# Altium PCB Panelized_EE02-Module.PcbDoc
Units mm, origin at the board's own origin, x right, y up, seen from the top; angles counter-clockwise.
Board outline 283.48 x 210.5 mm, 6 copper layers (Top, L2 (GND), L3, L4, L5 (PWR), Bottom), stack 0.956 mm thick; 4 components, 0 nets, 521 pads, 0 vias.
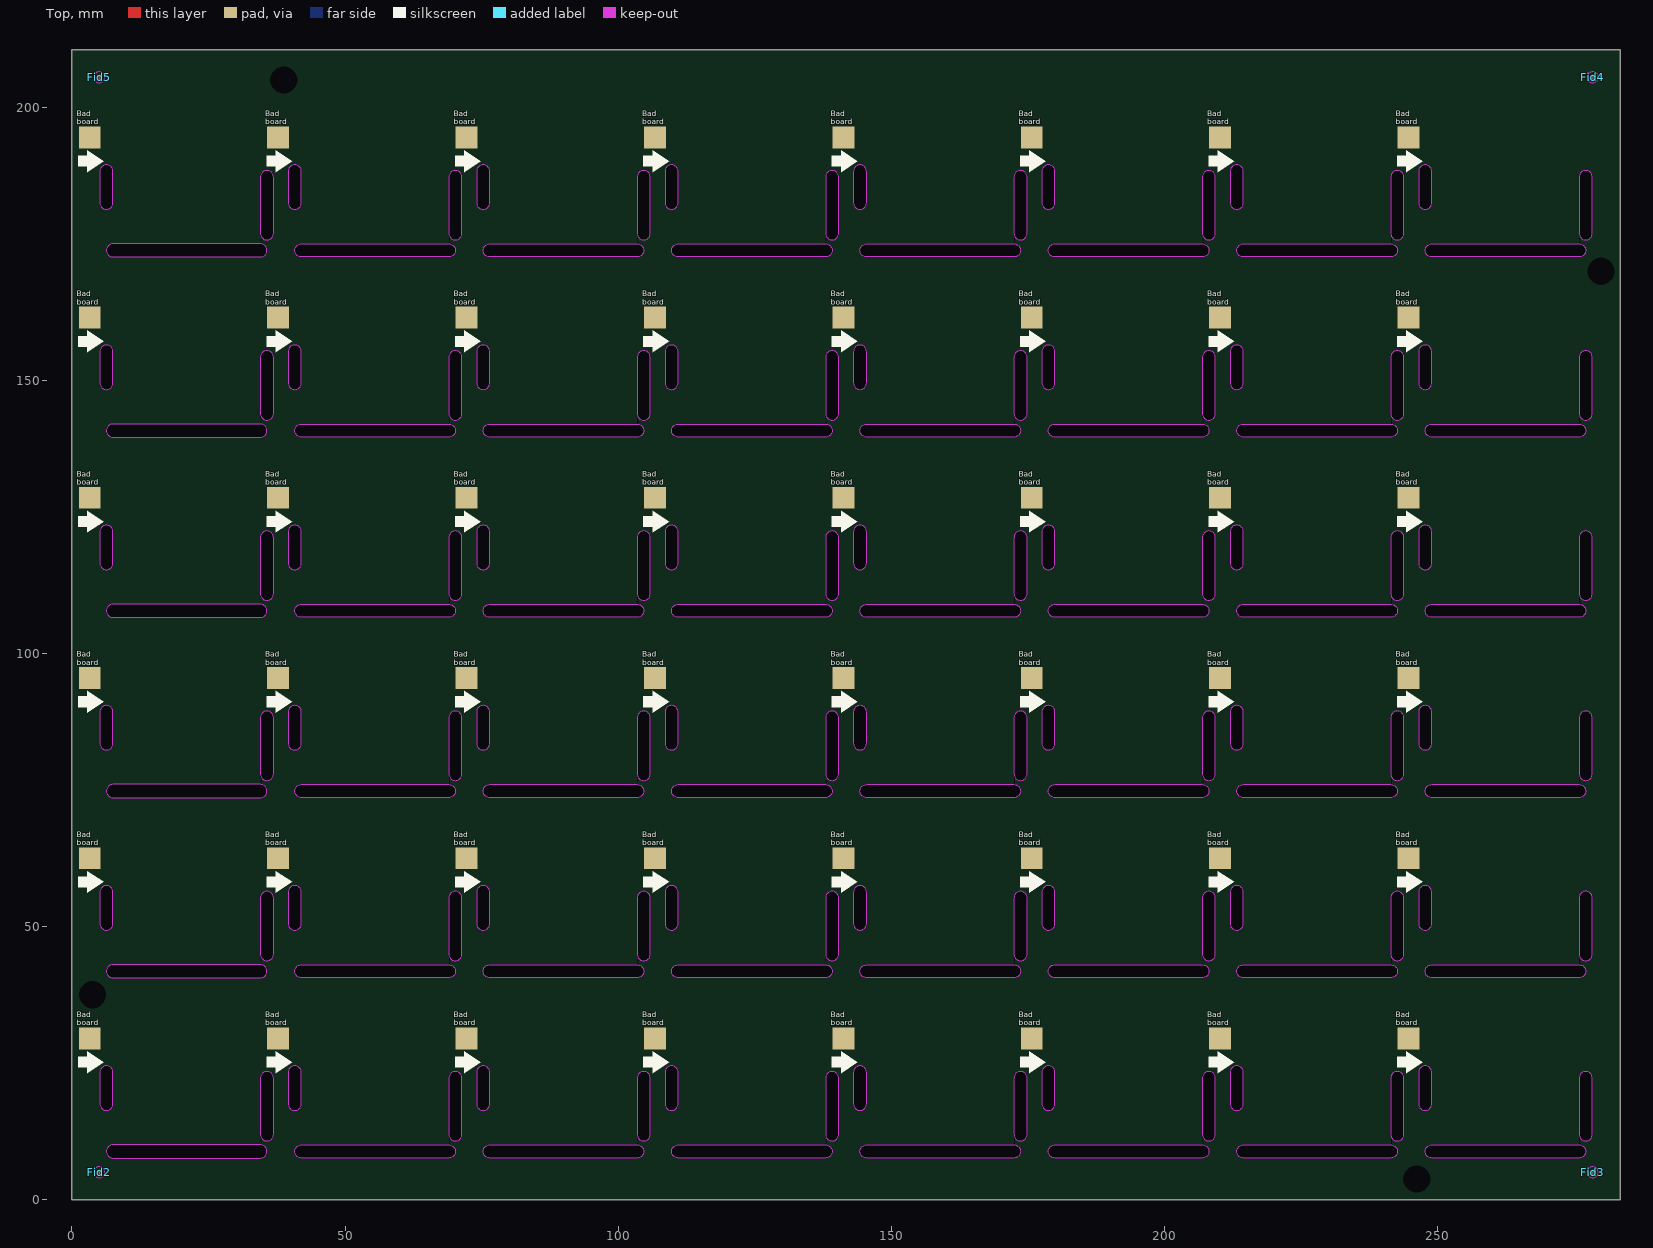
[diagram p0: Top view]
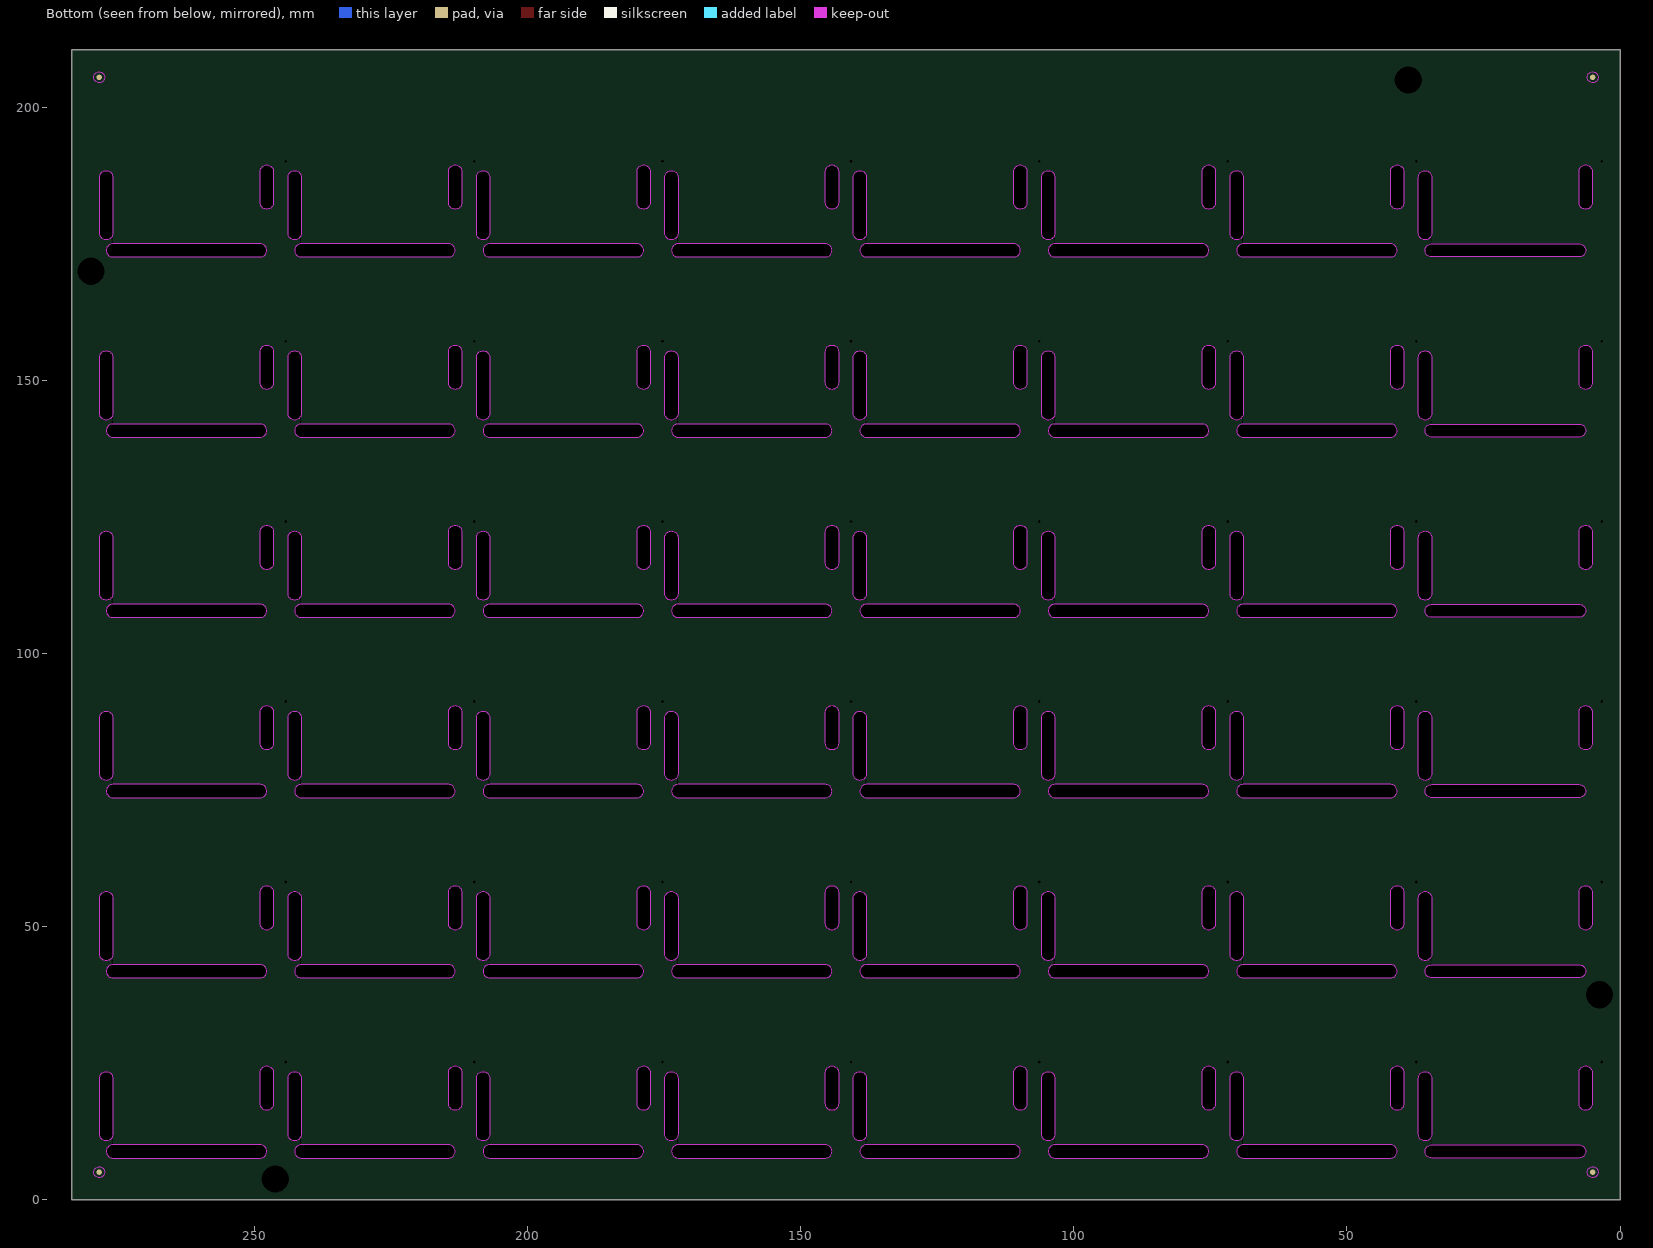
[diagram p1: Bottom view, seen from below]
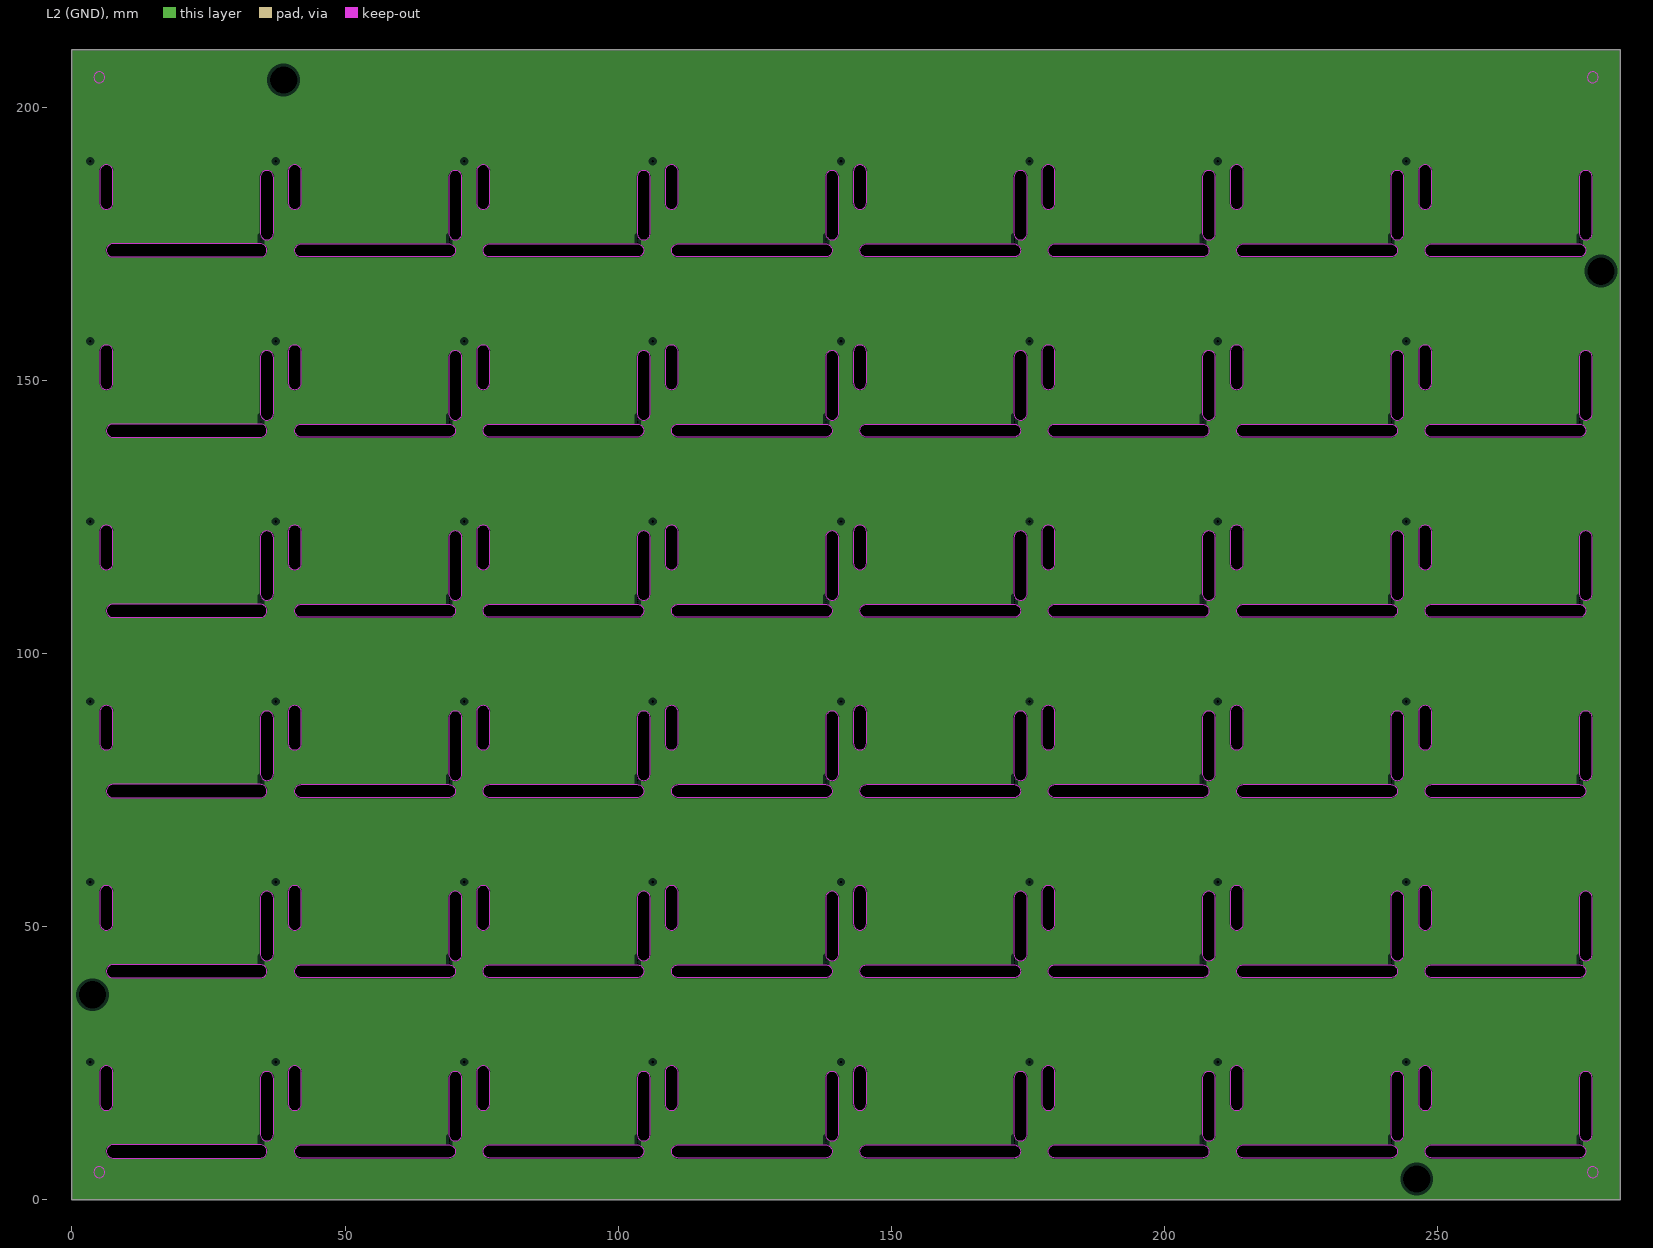
[diagram p2: L2 (GND), clearances drawn from the general rule]
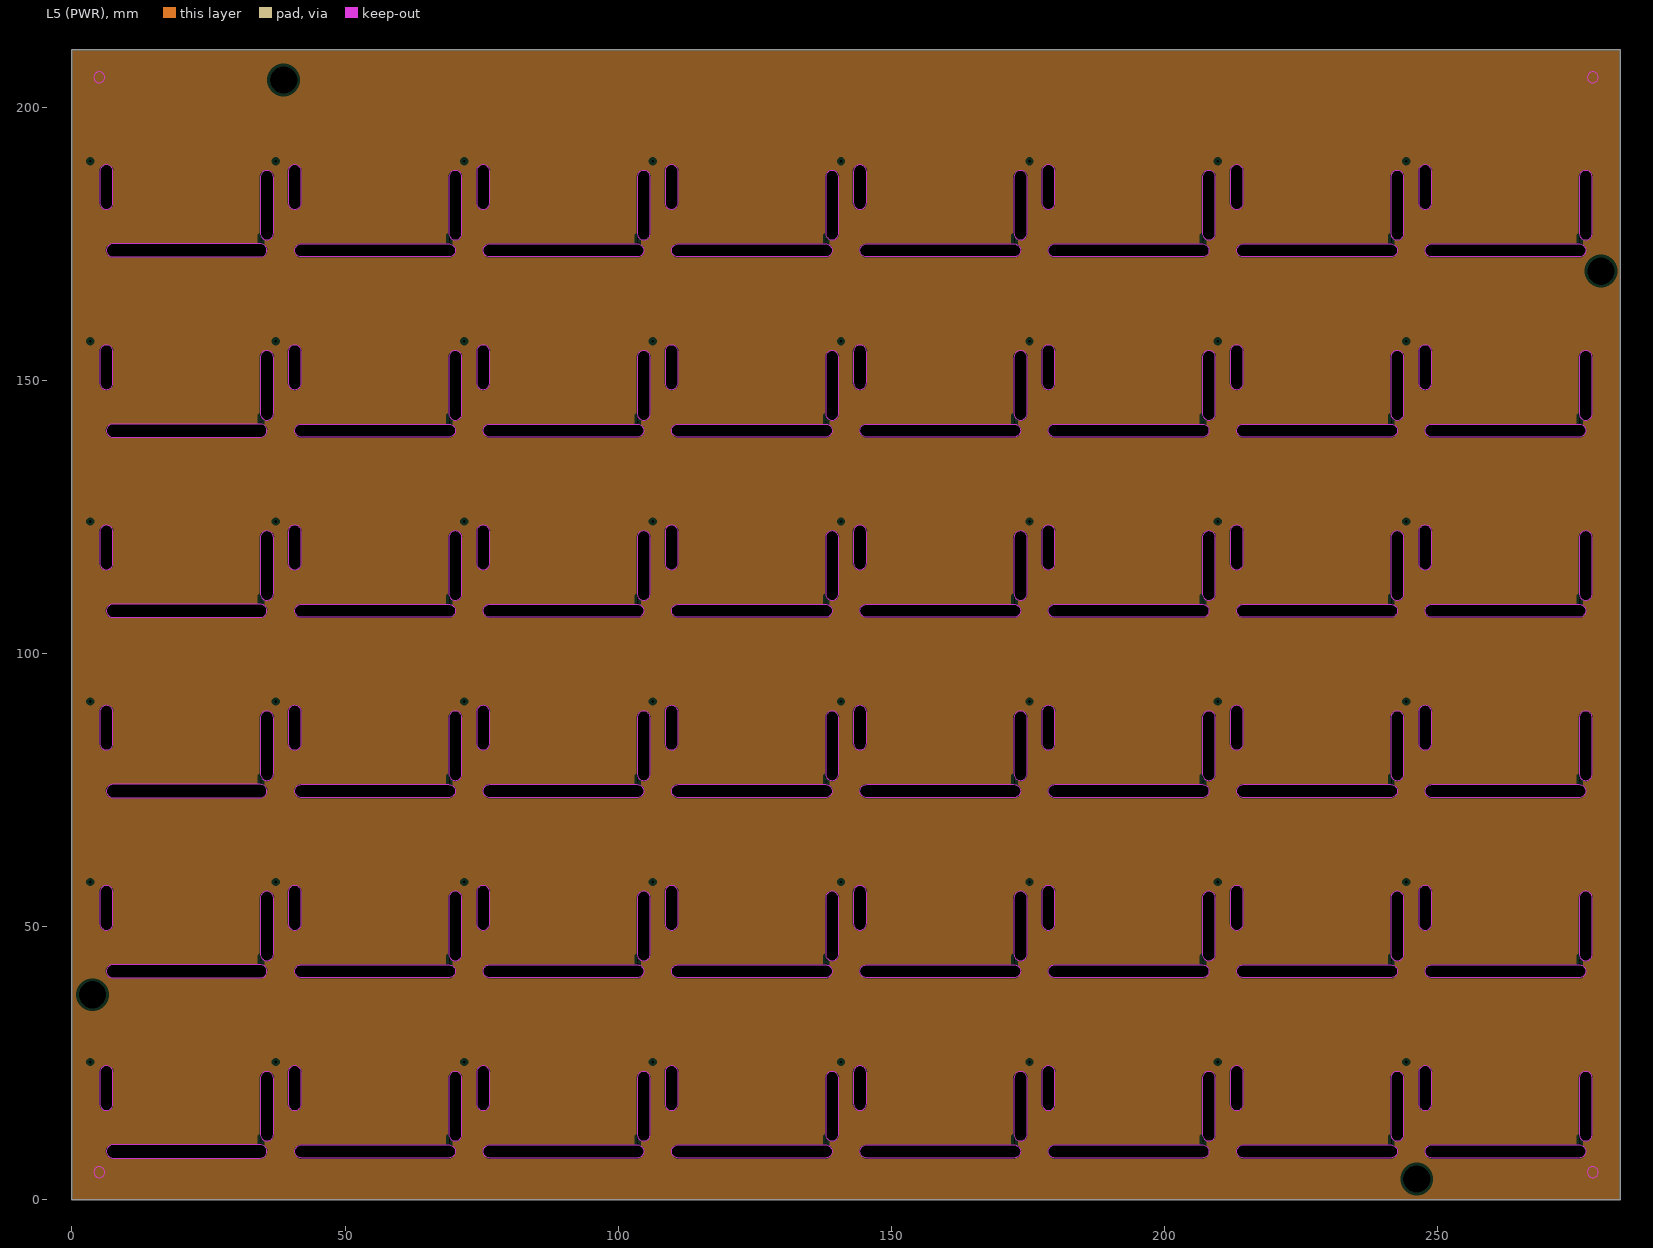
[diagram p3: L5 (PWR), clearances drawn from the general rule]

## Layer stack, top to bottom
Top Solder: solder mask 0.022, Solder Resist, Dk 3.5
Top: signal copper 0.012
Dielectric 1: prepreg 0.075, FR-4, Dk 4.2
L2 (GND): plane copper 0.018
Dielectric 3: core 0.1, Dk 4.2
L3: signal copper 0.018
Dielectric 4: prepreg 0.51, Dk 4.2
L4: signal copper 0.018
Dielectric 5: core 0.1, Dk 4.2
L5 (PWR): plane copper 0.018
Dielectric 6: prepreg 0.075, Dk 4.2
Bottom: signal copper 0.012
Bottom Solder: solder mask 0.022, Solder Resist, Dk 3.5

## Board outline
0,0 283.475,0 283.475,210.5 0,210.5
cut-out: 7.5,172.6 34.5,172.6 ccw(c34.5,173.8) 35.7,173.8 ccw(c34.5,173.8) 34.5,175 7.5,175 ccw(c7.5,173.8)
cut-out: 5.1,182.525 ccw(c6.3,182.525) 7.5,182.525 7.5,188.275 ccw(c6.3,188.275) 5.1,188.275
cut-out: 34.5,176.925 ccw(c35.7,176.925) 36.9,176.925 36.9,187.225 ccw(c35.7,187.225) 34.5,187.225
cut-out: 39.6,182.525 ccw(c40.8,182.525) 42,182.525 42,188.275 ccw(c40.8,188.275) 39.6,188.275
cut-out: 42,172.6 cw(c42,173.8) 42,175 69,175 cw(c69,173.8) 70.2,173.8 cw(c69,173.8) 69,172.6
cut-out: 69,176.925 ccw(c70.2,176.925) 71.4,176.925 71.4,187.225 ccw(c70.2,187.225) 69,187.225
cut-out: 74.1,182.525 ccw(c75.3,182.525) 76.5,182.525 76.5,188.275 ccw(c75.3,188.275) 74.1,188.275
cut-out: 76.5,172.6 cw(c76.5,173.8) 76.5,175 103.5,175 cw(c103.5,173.8) 104.7,173.8 cw(c103.5,173.8) 103.5,172.6
cut-out: 103.5,176.925 ccw(c104.7,176.925) 105.9,176.925 105.9,187.225 ccw(c104.7,187.225) 103.5,187.225
cut-out: 108.6,182.525 ccw(c109.8,182.525) 111,182.525 111,188.275 ccw(c109.8,188.275) 108.6,188.275
cut-out: 111,172.6 cw(c111,173.8) 111,175 138,175 cw(c138,173.8) 139.2,173.8 cw(c138,173.8) 138,172.6
cut-out: 138,176.925 ccw(c139.2,176.925) 140.4,176.925 140.4,187.225 ccw(c139.2,187.225) 138,187.225
cut-out: 143.1,182.525 ccw(c144.3,182.525) 145.5,182.525 145.5,188.275 ccw(c144.3,188.275) 143.1,188.275
cut-out: 145.5,172.6 cw(c145.5,173.8) 145.5,175 172.5,175 cw(c172.5,173.8) 173.7,173.8 cw(c172.5,173.8) 172.5,172.6
cut-out: 172.5,176.925 ccw(c173.7,176.925) 174.9,176.925 174.9,187.225 ccw(c173.7,187.225) 172.5,187.225
cut-out: 177.6,182.525 ccw(c178.8,182.525) 180,182.525 180,188.275 ccw(c178.8,188.275) 177.6,188.275
cut-out: 180,172.6 cw(c180,173.8) 180,175 207,175 cw(c207,173.8) 208.2,173.8 cw(c207,173.8) 207,172.6
cut-out: 207,176.925 ccw(c208.2,176.925) 209.4,176.925 209.4,187.225 ccw(c208.2,187.225) 207,187.225
cut-out: 212.1,182.525 ccw(c213.3,182.525) 214.5,182.525 214.5,188.275 ccw(c213.3,188.275) 212.1,188.275
cut-out: 214.5,172.6 cw(c214.5,173.8) 214.5,175 241.5,175 cw(c241.5,173.8) 242.7,173.8 cw(c241.5,173.8) 241.5,172.6
cut-out: 241.5,176.925 ccw(c242.7,176.925) 243.9,176.925 243.9,187.225 ccw(c242.7,187.225) 241.5,187.225
cut-out: 246.6,182.525 ccw(c247.8,182.525) 249,182.525 249,188.275 ccw(c247.8,188.275) 246.6,188.275
cut-out: 249,172.6 cw(c249,173.8) 249,175 276,175 cw(c276,173.8) 277.2,173.8 cw(c276,173.8) 276,172.6
cut-out: 276,176.925 ccw(c277.2,176.925) 278.4,176.925 278.4,187.225 ccw(c277.2,187.225) 276,187.225
cut-out: 7.5,139.6 34.5,139.6 ccw(c34.5,140.8) 35.7,140.8 ccw(c34.5,140.8) 34.5,142 7.5,142 ccw(c7.5,140.8)
cut-out: 5.1,149.525 ccw(c6.3,149.525) 7.5,149.525 7.5,155.275 ccw(c6.3,155.275) 5.1,155.275
cut-out: 34.5,143.925 ccw(c35.7,143.925) 36.9,143.925 36.9,154.225 ccw(c35.7,154.225) 34.5,154.225
cut-out: 39.6,149.525 ccw(c40.8,149.525) 42,149.525 42,155.275 ccw(c40.8,155.275) 39.6,155.275
cut-out: 42,139.6 cw(c42,140.8) 42,142 69,142 cw(c69,140.8) 70.2,140.8 cw(c69,140.8) 69,139.6
cut-out: 69,143.925 ccw(c70.2,143.925) 71.4,143.925 71.4,154.225 ccw(c70.2,154.225) 69,154.225
cut-out: 74.1,149.525 ccw(c75.3,149.525) 76.5,149.525 76.5,155.275 ccw(c75.3,155.275) 74.1,155.275
cut-out: 76.5,139.6 cw(c76.5,140.8) 76.5,142 103.5,142 cw(c103.5,140.8) 104.7,140.8 cw(c103.5,140.8) 103.5,139.6
cut-out: 103.5,143.925 ccw(c104.7,143.925) 105.9,143.925 105.9,154.225 ccw(c104.7,154.225) 103.5,154.225
cut-out: 108.6,149.525 ccw(c109.8,149.525) 111,149.525 111,155.275 ccw(c109.8,155.275) 108.6,155.275
cut-out: 111,139.6 cw(c111,140.8) 111,142 138,142 cw(c138,140.8) 139.2,140.8 cw(c138,140.8) 138,139.6
cut-out: 138,143.925 ccw(c139.2,143.925) 140.4,143.925 140.4,154.225 ccw(c139.2,154.225) 138,154.225
cut-out: 143.1,149.525 ccw(c144.3,149.525) 145.5,149.525 145.5,155.275 ccw(c144.3,155.275) 143.1,155.275
cut-out: 145.5,139.6 cw(c145.5,140.8) 145.5,142 172.5,142 cw(c172.5,140.8) 173.7,140.8 cw(c172.5,140.8) 172.5,139.6
cut-out: 172.5,143.925 ccw(c173.7,143.925) 174.9,143.925 174.9,154.225 ccw(c173.7,154.225) 172.5,154.225
cut-out: 177.6,149.525 ccw(c178.8,149.525) 180,149.525 180,155.275 ccw(c178.8,155.275) 177.6,155.275
cut-out: 180,139.6 cw(c180,140.8) 180,142 207,142 cw(c207,140.8) 208.2,140.8 cw(c207,140.8) 207,139.6
cut-out: 207,143.925 ccw(c208.2,143.925) 209.4,143.925 209.4,154.225 ccw(c208.2,154.225) 207,154.225
cut-out: 212.1,149.525 ccw(c213.3,149.525) 214.5,149.525 214.5,155.275 ccw(c213.3,155.275) 212.1,155.275
cut-out: 214.5,139.6 cw(c214.5,140.8) 214.5,142 241.5,142 cw(c241.5,140.8) 242.7,140.8 cw(c241.5,140.8) 241.5,139.6
cut-out: 241.5,143.925 ccw(c242.7,143.925) 243.9,143.925 243.9,154.225 ccw(c242.7,154.225) 241.5,154.225
cut-out: 246.6,149.525 ccw(c247.8,149.525) 249,149.525 249,155.275 ccw(c247.8,155.275) 246.6,155.275
cut-out: 249,139.6 cw(c249,140.8) 249,142 276,142 cw(c276,140.8) 277.2,140.8 cw(c276,140.8) 276,139.6
cut-out: 276,143.925 ccw(c277.2,143.925) 278.4,143.925 278.4,154.225 ccw(c277.2,154.225) 276,154.225
cut-out: 7.5,106.6 34.5,106.6 ccw(c34.5,107.8) 35.7,107.8 ccw(c34.5,107.8) 34.5,109 7.5,109 ccw(c7.5,107.8)
cut-out: 5.1,116.525 ccw(c6.3,116.525) 7.5,116.525 7.5,122.275 ccw(c6.3,122.275) 5.1,122.275
cut-out: 34.5,110.925 ccw(c35.7,110.925) 36.9,110.925 36.9,121.225 ccw(c35.7,121.225) 34.5,121.225
cut-out: 39.6,116.525 ccw(c40.8,116.525) 42,116.525 42,122.275 ccw(c40.8,122.275) 39.6,122.275
cut-out: 42,106.6 cw(c42,107.8) 42,109 69,109 cw(c69,107.8) 70.2,107.8 cw(c69,107.8) 69,106.6
cut-out: 69,110.925 ccw(c70.2,110.925) 71.4,110.925 71.4,121.225 ccw(c70.2,121.225) 69,121.225
cut-out: 74.1,116.525 ccw(c75.3,116.525) 76.5,116.525 76.5,122.275 ccw(c75.3,122.275) 74.1,122.275
cut-out: 76.5,106.6 cw(c76.5,107.8) 76.5,109 103.5,109 cw(c103.5,107.8) 104.7,107.8 cw(c103.5,107.8) 103.5,106.6
cut-out: 103.5,110.925 ccw(c104.7,110.925) 105.9,110.925 105.9,121.225 ccw(c104.7,121.225) 103.5,121.225
cut-out: 108.6,116.525 ccw(c109.8,116.525) 111,116.525 111,122.275 ccw(c109.8,122.275) 108.6,122.275
cut-out: 111,106.6 cw(c111,107.8) 111,109 138,109 cw(c138,107.8) 139.2,107.8 cw(c138,107.8) 138,106.6
cut-out: 138,110.925 ccw(c139.2,110.925) 140.4,110.925 140.4,121.225 ccw(c139.2,121.225) 138,121.225
cut-out: 143.1,116.525 ccw(c144.3,116.525) 145.5,116.525 145.5,122.275 ccw(c144.3,122.275) 143.1,122.275
cut-out: 145.5,106.6 cw(c145.5,107.8) 145.5,109 172.5,109 cw(c172.5,107.8) 173.7,107.8 cw(c172.5,107.8) 172.5,106.6
cut-out: 172.5,110.925 ccw(c173.7,110.925) 174.9,110.925 174.9,121.225 ccw(c173.7,121.225) 172.5,121.225
cut-out: 177.6,116.525 ccw(c178.8,116.525) 180,116.525 180,122.275 ccw(c178.8,122.275) 177.6,122.275
cut-out: 180,106.6 cw(c180,107.8) 180,109 207,109 cw(c207,107.8) 208.2,107.8 cw(c207,107.8) 207,106.6
cut-out: 207,110.925 ccw(c208.2,110.925) 209.4,110.925 209.4,121.225 ccw(c208.2,121.225) 207,121.225
cut-out: 212.1,116.525 ccw(c213.3,116.525) 214.5,116.525 214.5,122.275 ccw(c213.3,122.275) 212.1,122.275
cut-out: 214.5,106.6 cw(c214.5,107.8) 214.5,109 241.5,109 cw(c241.5,107.8) 242.7,107.8 cw(c241.5,107.8) 241.5,106.6
cut-out: 241.5,110.925 ccw(c242.7,110.925) 243.9,110.925 243.9,121.225 ccw(c242.7,121.225) 241.5,121.225
cut-out: 246.6,116.525 ccw(c247.8,116.525) 249,116.525 249,122.275 ccw(c247.8,122.275) 246.6,122.275
cut-out: 249,106.6 cw(c249,107.8) 249,109 276,109 cw(c276,107.8) 277.2,107.8 cw(c276,107.8) 276,106.6
cut-out: 276,110.925 ccw(c277.2,110.925) 278.4,110.925 278.4,121.225 ccw(c277.2,121.225) 276,121.225
cut-out: 7.5,73.6 34.5,73.6 ccw(c34.5,74.8) 35.7,74.8 ccw(c34.5,74.8) 34.5,76 7.5,76 ccw(c7.5,74.8)
cut-out: 5.1,83.525 ccw(c6.3,83.525) 7.5,83.525 7.5,89.275 ccw(c6.3,89.275) 5.1,89.275
cut-out: 34.5,77.925 ccw(c35.7,77.925) 36.9,77.925 36.9,88.225 ccw(c35.7,88.225) 34.5,88.225
cut-out: 39.6,83.525 ccw(c40.8,83.525) 42,83.525 42,89.275 ccw(c40.8,89.275) 39.6,89.275
cut-out: 42,73.6 cw(c42,74.8) 42,76 69,76 cw(c69,74.8) 70.2,74.8 cw(c69,74.8) 69,73.6
cut-out: 69,77.925 ccw(c70.2,77.925) 71.4,77.925 71.4,88.225 ccw(c70.2,88.225) 69,88.225
cut-out: 74.1,83.525 ccw(c75.3,83.525) 76.5,83.525 76.5,89.275 ccw(c75.3,89.275) 74.1,89.275
cut-out: 76.5,73.6 cw(c76.5,74.8) 76.5,76 103.5,76 cw(c103.5,74.8) 104.7,74.8 cw(c103.5,74.8) 103.5,73.6
cut-out: 103.5,77.925 ccw(c104.7,77.925) 105.9,77.925 105.9,88.225 ccw(c104.7,88.225) 103.5,88.225
cut-out: 108.6,83.525 ccw(c109.8,83.525) 111,83.525 111,89.275 ccw(c109.8,89.275) 108.6,89.275
cut-out: 111,73.6 cw(c111,74.8) 111,76 138,76 cw(c138,74.8) 139.2,74.8 cw(c138,74.8) 138,73.6
cut-out: 138,77.925 ccw(c139.2,77.925) 140.4,77.925 140.4,88.225 ccw(c139.2,88.225) 138,88.225
cut-out: 143.1,83.525 ccw(c144.3,83.525) 145.5,83.525 145.5,89.275 ccw(c144.3,89.275) 143.1,89.275
cut-out: 145.5,73.6 cw(c145.5,74.8) 145.5,76 172.5,76 cw(c172.5,74.8) 173.7,74.8 cw(c172.5,74.8) 172.5,73.6
cut-out: 172.5,77.925 ccw(c173.7,77.925) 174.9,77.925 174.9,88.225 ccw(c173.7,88.225) 172.5,88.225
cut-out: 177.6,83.525 ccw(c178.8,83.525) 180,83.525 180,89.275 ccw(c178.8,89.275) 177.6,89.275
cut-out: 180,73.6 cw(c180,74.8) 180,76 207,76 cw(c207,74.8) 208.2,74.8 cw(c207,74.8) 207,73.6
cut-out: 207,77.925 ccw(c208.2,77.925) 209.4,77.925 209.4,88.225 ccw(c208.2,88.225) 207,88.225
cut-out: 212.1,83.525 ccw(c213.3,83.525) 214.5,83.525 214.5,89.275 ccw(c213.3,89.275) 212.1,89.275
cut-out: 214.5,73.6 cw(c214.5,74.8) 214.5,76 241.5,76 cw(c241.5,74.8) 242.7,74.8 cw(c241.5,74.8) 241.5,73.6
cut-out: 241.5,77.925 ccw(c242.7,77.925) 243.9,77.925 243.9,88.225 ccw(c242.7,88.225) 241.5,88.225
cut-out: 246.6,83.525 ccw(c247.8,83.525) 249,83.525 249,89.275 ccw(c247.8,89.275) 246.6,89.275
cut-out: 249,73.6 cw(c249,74.8) 249,76 276,76 cw(c276,74.8) 277.2,74.8 cw(c276,74.8) 276,73.6
cut-out: 276,77.925 ccw(c277.2,77.925) 278.4,77.925 278.4,88.225 ccw(c277.2,88.225) 276,88.225
cut-out: 7.5,40.6 34.5,40.6 ccw(c34.5,41.8) 35.7,41.8 ccw(c34.5,41.8) 34.5,43 7.5,43 ccw(c7.5,41.8)
cut-out: 5.1,50.525 ccw(c6.3,50.525) 7.5,50.525 7.5,56.275 ccw(c6.3,56.275) 5.1,56.275
cut-out: 34.5,44.925 ccw(c35.7,44.925) 36.9,44.925 36.9,55.225 ccw(c35.7,55.225) 34.5,55.225
cut-out: 39.6,50.525 ccw(c40.8,50.525) 42,50.525 42,56.275 ccw(c40.8,56.275) 39.6,56.275
cut-out: 42,40.6 cw(c42,41.8) 42,43 69,43 cw(c69,41.8) 70.2,41.8 cw(c69,41.8) 69,40.6
cut-out: 69,44.925 ccw(c70.2,44.925) 71.4,44.925 71.4,55.225 ccw(c70.2,55.225) 69,55.225
cut-out: 74.1,50.525 ccw(c75.3,50.525) 76.5,50.525 76.5,56.275 ccw(c75.3,56.275) 74.1,56.275
cut-out: 76.5,40.6 cw(c76.5,41.8) 76.5,43 103.5,43 cw(c103.5,41.8) 104.7,41.8 cw(c103.5,41.8) 103.5,40.6
cut-out: 103.5,44.925 ccw(c104.7,44.925) 105.9,44.925 105.9,55.225 ccw(c104.7,55.225) 103.5,55.225
cut-out: 108.6,50.525 ccw(c109.8,50.525) 111,50.525 111,56.275 ccw(c109.8,56.275) 108.6,56.275
cut-out: 111,40.6 cw(c111,41.8) 111,43 138,43 cw(c138,41.8) 139.2,41.8 cw(c138,41.8) 138,40.6
cut-out: 138,44.925 ccw(c139.2,44.925) 140.4,44.925 140.4,55.225 ccw(c139.2,55.225) 138,55.225
cut-out: 143.1,50.525 ccw(c144.3,50.525) 145.5,50.525 145.5,56.275 ccw(c144.3,56.275) 143.1,56.275
cut-out: 145.5,40.6 cw(c145.5,41.8) 145.5,43 172.5,43 cw(c172.5,41.8) 173.7,41.8 cw(c172.5,41.8) 172.5,40.6
cut-out: 172.5,44.925 ccw(c173.7,44.925) 174.9,44.925 174.9,55.225 ccw(c173.7,55.225) 172.5,55.225
cut-out: 177.6,50.525 ccw(c178.8,50.525) 180,50.525 180,56.275 ccw(c178.8,56.275) 177.6,56.275
cut-out: 180,40.6 cw(c180,41.8) 180,43 207,43 cw(c207,41.8) 208.2,41.8 cw(c207,41.8) 207,40.6
cut-out: 207,44.925 ccw(c208.2,44.925) 209.4,44.925 209.4,55.225 ccw(c208.2,55.225) 207,55.225
cut-out: 212.1,50.525 ccw(c213.3,50.525) 214.5,50.525 214.5,56.275 ccw(c213.3,56.275) 212.1,56.275
cut-out: 214.5,40.6 cw(c214.5,41.8) 214.5,43 241.5,43 cw(c241.5,41.8) 242.7,41.8 cw(c241.5,41.8) 241.5,40.6
cut-out: 241.5,44.925 ccw(c242.7,44.925) 243.9,44.925 243.9,55.225 ccw(c242.7,55.225) 241.5,55.225
cut-out: 246.6,50.525 ccw(c247.8,50.525) 249,50.525 249,56.275 ccw(c247.8,56.275) 246.6,56.275
cut-out: 249,40.6 cw(c249,41.8) 249,43 276,43 cw(c276,41.8) 277.2,41.8 cw(c276,41.8) 276,40.6
cut-out: 276,44.925 ccw(c277.2,44.925) 278.4,44.925 278.4,55.225 ccw(c277.2,55.225) 276,55.225
cut-out: 276,11.925 ccw(c277.2,11.925) 278.4,11.925 278.4,22.225 ccw(c277.2,22.225) 276,22.225
cut-out: 249,7.6 cw(c249,8.8) 249,10 276,10 cw(c276,8.8) 277.2,8.8 cw(c276,8.8) 276,7.6
cut-out: 246.6,17.525 ccw(c247.8,17.525) 249,17.525 249,23.275 ccw(c247.8,23.275) 246.6,23.275
cut-out: 241.5,11.925 ccw(c242.7,11.925) 243.9,11.925 243.9,22.225 ccw(c242.7,22.225) 241.5,22.225
cut-out: 214.5,7.6 cw(c214.5,8.8) 214.5,10 241.5,10 cw(c241.5,8.8) 242.7,8.8 cw(c241.5,8.8) 241.5,7.6
cut-out: 212.1,17.525 ccw(c213.3,17.525) 214.5,17.525 214.5,23.275 ccw(c213.3,23.275) 212.1,23.275
cut-out: 207,11.925 ccw(c208.2,11.925) 209.4,11.925 209.4,22.225 ccw(c208.2,22.225) 207,22.225
cut-out: 180,7.6 cw(c180,8.8) 180,10 207,10 cw(c207,8.8) 208.2,8.8 cw(c207,8.8) 207,7.6
cut-out: 177.6,17.525 ccw(c178.8,17.525) 180,17.525 180,23.275 ccw(c178.8,23.275) 177.6,23.275
cut-out: 172.5,11.925 ccw(c173.7,11.925) 174.9,11.925 174.9,22.225 ccw(c173.7,22.225) 172.5,22.225
cut-out: 145.5,7.6 cw(c145.5,8.8) 145.5,10 172.5,10 cw(c172.5,8.8) 173.7,8.8 cw(c172.5,8.8) 172.5,7.6
cut-out: 143.1,17.525 ccw(c144.3,17.525) 145.5,17.525 145.5,23.275 ccw(c144.3,23.275) 143.1,23.275
cut-out: 138,11.925 ccw(c139.2,11.925) 140.4,11.925 140.4,22.225 ccw(c139.2,22.225) 138,22.225
cut-out: 111,7.6 cw(c111,8.8) 111,10 138,10 cw(c138,8.8) 139.2,8.8 cw(c138,8.8) 138,7.6
cut-out: 108.6,17.525 ccw(c109.8,17.525) 111,17.525 111,23.275 ccw(c109.8,23.275) 108.6,23.275
cut-out: 103.5,11.925 ccw(c104.7,11.925) 105.9,11.925 105.9,22.225 ccw(c104.7,22.225) 103.5,22.225
cut-out: 76.5,7.6 cw(c76.5,8.8) 76.5,10 103.5,10 cw(c103.5,8.8) 104.7,8.8 cw(c103.5,8.8) 103.5,7.6
cut-out: 74.1,17.525 ccw(c75.3,17.525) 76.5,17.525 76.5,23.275 ccw(c75.3,23.275) 74.1,23.275
cut-out: 69,11.925 ccw(c70.2,11.925) 71.4,11.925 71.4,22.225 ccw(c70.2,22.225) 69,22.225
cut-out: 42,7.6 cw(c42,8.8) 42,10 69,10 cw(c69,8.8) 70.2,8.8 cw(c69,8.8) 69,7.6
cut-out: 39.6,17.525 ccw(c40.8,17.525) 42,17.525 42,23.275 ccw(c40.8,23.275) 39.6,23.275
cut-out: 34.5,11.925 ccw(c35.7,11.925) 36.9,11.925 36.9,22.225 ccw(c35.7,22.225) 34.5,22.225
cut-out: 5.1,17.525 ccw(c6.3,17.525) 7.5,17.525 7.5,23.275 ccw(c6.3,23.275) 5.1,23.275
cut-out: 7.5,7.6 34.5,7.6 ccw(c34.5,8.8) 35.7,8.8 ccw(c34.5,8.8) 34.5,10 7.5,10 ccw(c7.5,8.8)

## Design rules (kind name [scope] priority, off if disabled: settings)
Clearance [All] p1: gap=0.254
PlaneClearance [All] p1: clearance=0.508
PlaneConnect [All] p1: planeconnectstyle=Relief reliefexpansion=0.508 reliefentries=4 reliefconductorwidth=0.254 reliefairgap=0.254
PolygonConnect [All] p1: connectstyle=Relief reliefconductorwidth=0.254 reliefentries=4 polygonreliefangle="90 Angle" airgapwidth=0.254
RoutingVias [All] p1: holewidth=0.711 width=1.27 viastyle="Through Hole" minholewidth=0.711 minwidth=1.27 maxholewidth=0.711 maxwidth=1.27
SolderMaskExpansion [All] p1: expansion=0.102
Width [All] p1: maxlimit=0.254 minlimit=0.254 preferedwidth=0.254
28 further rules are at their usual default settings.

## Components (designator, comment, footprint, x,y, rotation, side; value= is the part's Value field where it differs from the comment)
Fid2 "Fiducial" Fiducial 5,5 r0 top
Fid3 "Fiducial" Fiducial 278.5,5 r0 top
Fid4 "Fiducial" Fiducial 278.5,205.5 r0 top
Fid5 "Fiducial" Fiducial 5,205.5 r0 top

## Footprints (in the part's own frame and the unit in brackets; to place one, negate y for a bottom-side part, rotate by r counter-clockwise, add the part's x,y. Pads: shape width x height; smd on the part's side, far side on the other; paste and mask are expansions set on the pad)
Fiducial [mm]
  round 1 smd paste-10 mask+0.5: 0(0,0)
  round 1 smd far side paste-10 mask+0.5: 0(0,0)
  Keep-Out Layer circle w0.01: c0,0 r1

## Free pads (board coordinates)
  rect 4x4 smd paste-10 mask+0: 1(3.25,29.5) 1(3.25,62.5) 1(3.25,95.5) 1(3.25,128.5) 1(3.25,161.5) 1(3.25,194.5) 10(37.75,29.5) 10(37.75,62.5) 10(37.75,95.5) 10(37.75,128.5) 10(37.75,161.5) 10(37.75,194.5) 11(72.25,29.5) 11(72.25,62.5) 11(72.25,95.5) 11(72.25,128.5) 11(72.25,161.5) 11(72.25,194.5) 12(106.75,29.5) 12(106.75,62.5) 12(106.75,95.5) 12(106.75,128.5) 12(106.75,161.5) 12(106.75,194.5) 13(141.25,29.5) 13(141.25,62.5) 13(141.25,95.5) 13(141.25,128.5) 13(141.25,161.5) 13(141.25,194.5) 14(175.75,29.5) 14(175.75,62.5) 14(175.75,95.5) 14(175.75,128.5) 14(175.75,161.5) 14(175.75,194.5) 15(210.25,29.5) 15(210.25,62.5) 15(210.25,95.5) 15(210.25,128.5) 15(210.25,161.5) 15(210.25,194.5) 16(244.75,29.5) 16(244.75,62.5) 16(244.75,95.5) 16(244.75,128.5) 16(244.75,161.5) 16(244.75,194.5)
  rect 0x0 hole 0.2 unplated paste+0 mask+0: 1(34.6,11.25) 1(34.6,44.25) 1(34.6,77.25) 1(34.6,110.25) 1(34.6,143.25) 1(34.6,143.25) 1(34.6,176.25) 1(34.6,176.25) 1(34.6,176.25) 1(69.1,11.25) 1(69.1,44.25) 1(69.1,77.25) 1(69.1,110.25) 1(69.1,143.25) 1(69.1,143.25) 1(69.1,176.25) 1(69.1,176.25) 1(103.6,11.25) 1(103.6,44.25) 1(103.6,77.25) 1(103.6,110.25) 1(103.6,143.25) 1(103.6,143.25) 1(103.6,176.25) 1(138.1,11.25) 1(138.1,44.25) 1(138.1,77.25) 1(138.1,110.25) 1(138.1,143.25) 1(138.1,143.25) 1(138.1,176.25) 1(172.6,11.25) 1(172.6,44.25) 1(172.6,77.25) 1(172.6,110.25) 1(172.6,143.25) 1(172.6,143.25) 1(172.6,176.25) 1(207.1,11.25) 1(207.1,44.25) 1(207.1,77.25) 1(207.1,110.25) 1(207.1,143.25) 1(207.1,143.25) 1(207.1,143.25) 1(207.1,176.25) 1(241.6,11.25) 1(241.6,44.25) 1(241.6,77.25) 1(241.6,110.25) 1(241.6,143.25) 1(241.6,143.25) 1(241.6,176.25) 1(276.1,11.25) 1(276.1,44.25) 1(276.1,77.25) 1(276.1,110.25) 1(276.1,143.25) 1(276.1,176.25) 2(34.6,10.5) 2(34.6,43.5) 2(34.6,76.5) 2(34.6,109.5) 2(34.6,142.5) 2(34.6,142.5) 2(34.6,175.5) 2(34.6,175.5) 2(34.6,175.5) 2(69.1,10.5) 2(69.1,43.5) 2(69.1,76.5) 2(69.1,109.5) 2(69.1,142.5) 2(69.1,142.5) 2(69.1,175.5) 2(69.1,175.5) 2(103.6,10.5) 2(103.6,43.5) 2(103.6,76.5) 2(103.6,109.5) 2(103.6,142.5) 2(103.6,142.5) 2(103.6,175.5) 2(138.1,10.5) 2(138.1,43.5) 2(138.1,76.5) 2(138.1,109.5) 2(138.1,142.5) 2(138.1,142.5) 2(138.1,175.5) 2(172.6,10.5) 2(172.6,43.5) 2(172.6,76.5) 2(172.6,109.5) 2(172.6,142.5) 2(172.6,142.5) 2(172.6,175.5) 2(207.1,10.5) 2(207.1,43.5) 2(207.1,76.5) 2(207.1,109.5) 2(207.1,142.5) 2(207.1,142.5) 2(207.1,142.5) 2(207.1,175.5) 2(241.6,10.5) 2(241.6,43.5) 2(241.6,76.5) 2(241.6,109.5) 2(241.6,142.5) 2(241.6,142.5) 2(241.6,175.5) 2(276.1,10.5) 2(276.1,43.5) 2(276.1,76.5) 2(276.1,109.5) 2(276.1,142.5) 2(276.1,175.5) 3(34.6,10.25) 3(34.6,43.25) 3(34.6,76.25) 3(34.6,109.25) 3(34.6,142.25) 3(34.6,142.25) 3(34.6,175.25) 3(34.6,175.25) 3(34.6,175.25) 3(69.1,10.25) 3(69.1,43.25) 3(69.1,76.25) 3(69.1,109.25) 3(69.1,142.25) 3(69.1,142.25) 3(69.1,175.25) 3(69.1,175.25) 3(103.6,10.25) 3(103.6,43.25) 3(103.6,76.25) 3(103.6,109.25) 3(103.6,142.25) 3(103.6,142.25) 3(103.6,175.25) 3(138.1,10.25) 3(138.1,43.25) 3(138.1,76.25) 3(138.1,109.25) 3(138.1,142.25) 3(138.1,142.25) 3(138.1,175.25) 3(172.6,10.25) 3(172.6,43.25) 3(172.6,76.25) 3(172.6,109.25) 3(172.6,142.25) 3(172.6,142.25) 3(172.6,175.25) 3(207.1,10.25) 3(207.1,43.25) 3(207.1,76.25) 3(207.1,109.25) 3(207.1,142.25) 3(207.1,142.25) 3(207.1,142.25) 3(207.1,175.25) 3(241.6,10.25) 3(241.6,43.25) 3(241.6,76.25) 3(241.6,109.25) 3(241.6,142.25) 3(241.6,142.25) 3(241.6,175.25) 3(276.1,10.25) 3(276.1,43.25) 3(276.1,76.25) 3(276.1,109.25) 3(276.1,142.25) 3(276.1,175.25) 4(34.6,10.025) 4(34.6,43.025) 4(34.6,76.025) 4(34.6,109.025) 4(34.6,142.025) 4(34.6,142.025) 4(34.6,175.025) 4(34.6,175.025) 4(34.6,175.025) 4(69.1,10.025) 4(69.1,43.025) 4(69.1,76.025) 4(69.1,109.025) 4(69.1,142.025) 4(69.1,142.025) 4(69.1,175.025) 4(69.1,175.025) 4(103.6,10.025) 4(103.6,43.025) 4(103.6,76.025) 4(103.6,109.025) 4(103.6,142.025) 4(103.6,142.025) 4(103.6,175.025) 4(138.1,10.025) 4(138.1,43.025) 4(138.1,76.025) 4(138.1,109.025) 4(138.1,142.025) 4(138.1,142.025) 4(138.1,175.025) 4(172.6,10.025) 4(172.6,43.025) 4(172.6,76.025) 4(172.6,109.025) 4(172.6,142.025) 4(172.6,142.025) 4(172.6,175.025) 4(207.1,10.025) 4(207.1,43.025) 4(207.1,76.025) 4(207.1,109.025) 4(207.1,142.025) 4(207.1,142.025) 4(207.1,142.025) 4(207.1,175.025) 4(241.6,10.025) 4(241.6,43.025) 4(241.6,76.025) 4(241.6,109.025) 4(241.6,142.025) 4(241.6,142.025) 4(241.6,175.025) 4(276.1,10.025) 4(276.1,43.025) 4(276.1,76.025) 4(276.1,109.025) 4(276.1,142.025) 4(276.1,175.025) 5(34.6,10.75) 5(34.6,43.75) 5(34.6,76.75) 5(34.6,109.75) 5(34.6,142.75) 5(34.6,142.75) 5(34.6,175.75) 5(34.6,175.75) 5(34.6,175.75) 5(69.1,10.75) 5(69.1,43.75) 5(69.1,76.75) 5(69.1,109.75) 5(69.1,142.75) 5(69.1,142.75) 5(69.1,175.75) 5(69.1,175.75) 5(103.6,10.75) 5(103.6,43.75) 5(103.6,76.75) 5(103.6,109.75) 5(103.6,142.75) 5(103.6,142.75) 5(103.6,175.75) 5(138.1,10.75) 5(138.1,43.75) 5(138.1,76.75) 5(138.1,109.75) 5(138.1,142.75) 5(138.1,142.75) 5(138.1,175.75) 5(172.6,10.75) 5(172.6,43.75) 5(172.6,76.75) 5(172.6,109.75) 5(172.6,142.75) 5(172.6,142.75) 5(172.6,175.75) 5(207.1,10.75) 5(207.1,43.75) 5(207.1,76.75) 5(207.1,109.75) 5(207.1,142.75) 5(207.1,142.75) 5(207.1,142.75) 5(207.1,175.75) 5(241.6,10.75) 5(241.6,43.75) 5(241.6,76.75) 5(241.6,109.75) 5(241.6,142.75) 5(241.6,142.75) 5(241.6,175.75) 5(276.1,10.75) 5(276.1,43.75) 5(276.1,76.75) 5(276.1,109.75) 5(276.1,142.75) 5(276.1,175.75) 6(34.6,11) 6(34.6,44) 6(34.6,77) 6(34.6,110) 6(34.6,143) 6(34.6,143) 6(34.6,176) 6(34.6,176) 6(34.6,176) 6(69.1,11) 6(69.1,44) 6(69.1,77) 6(69.1,110) 6(69.1,143) 6(69.1,143) 6(69.1,176) 6(69.1,176) 6(103.6,11) 6(103.6,44) 6(103.6,77) 6(103.6,110) 6(103.6,143) 6(103.6,143) 6(103.6,176) 6(138.1,11) 6(138.1,44) 6(138.1,77) 6(138.1,110) 6(138.1,143) 6(138.1,143) 6(138.1,176) 6(172.6,11) 6(172.6,44) 6(172.6,77) 6(172.6,110) 6(172.6,143) 6(172.6,143) 6(172.6,176) 6(207.1,11) 6(207.1,44) 6(207.1,77) 6(207.1,110) 6(207.1,143) 6(207.1,143) 6(207.1,143) 6(207.1,176) 6(241.6,11) 6(241.6,44) 6(241.6,77) 6(241.6,110) 6(241.6,143) 6(241.6,143) 6(241.6,176) 6(276.1,11) 6(276.1,44) 6(276.1,77) 6(276.1,110) 6(276.1,143) 6(276.1,176) 7(34.6,11.5) 7(34.6,44.5) 7(34.6,77.5) 7(34.6,110.5) 7(34.6,143.5) 7(34.6,143.5) 7(34.6,176.5) 7(34.6,176.5) 7(34.6,176.5) 7(69.1,11.5) 7(69.1,44.5) 7(69.1,77.5) 7(69.1,110.5) 7(69.1,143.5) 7(69.1,143.5) 7(69.1,176.5) 7(69.1,176.5) 7(103.6,11.5) 7(103.6,44.5) 7(103.6,77.5) 7(103.6,110.5) 7(103.6,143.5) 7(103.6,143.5) 7(103.6,176.5) 7(138.1,11.5) 7(138.1,44.5) 7(138.1,77.5) 7(138.1,110.5) 7(138.1,143.5) 7(138.1,143.5) 7(138.1,176.5) 7(172.6,11.5) 7(172.6,44.5) 7(172.6,77.5) 7(172.6,110.5) 7(172.6,143.5) 7(172.6,143.5) 7(172.6,176.5) 7(207.1,11.5) 7(207.1,44.5) 7(207.1,77.5) 7(207.1,110.5) 7(207.1,143.5) 7(207.1,143.5) 7(207.1,143.5) 7(207.1,176.5) 7(241.6,11.5) 7(241.6,44.5) 7(241.6,77.5) 7(241.6,110.5) 7(241.6,143.5) 7(241.6,143.5) 7(241.6,176.5) 7(276.1,11.5) 7(276.1,44.5) 7(276.1,77.5) 7(276.1,110.5) 7(276.1,143.5) 7(276.1,176.5)
  rect 0x0 hole 5 unplated paste+0 mask+0: 8(3.75,37.5) 8(38.75,205) 8(246.25,3.75) 9(280,170)
  rect 0x0 hole 0.5 unplated paste+0 mask+0: 17(3.35,25.175) 17(37.325,25.175) 17(71.825,25.175) 17(106.325,25.175) 17(140.825,25.175) 17(175.325,25.175) 17(209.825,25.175) 17(244.325,25.175) 18(3.35,58.15) 18(37.325,58.15) 18(71.825,58.15) 18(106.325,58.15) 18(140.825,58.15) 18(175.325,58.15) 18(209.825,58.15) 18(244.325,58.15) 19(3.35,91.175) 19(37.325,91.175) 19(71.825,91.175) 19(106.325,91.175) 19(140.825,91.175) 19(175.325,91.175) 19(209.825,91.175) 19(244.325,91.175) 20(3.35,124.15) 20(37.325,124.15) 20(71.825,124.15) 20(106.325,124.15) 20(140.825,124.15) 20(175.325,124.15) 20(209.825,124.15) 20(244.325,124.15) 21(3.35,157.175) 21(37.325,157.175) 21(71.825,157.175) 21(106.325,157.175) 21(140.825,157.175) 21(175.325,157.175) 21(209.825,157.175) 21(244.325,157.175) 22(3.35,190.15) 22(37.325,190.15) 22(71.825,190.15) 22(106.325,190.15) 22(140.825,190.15) 22(175.325,190.15) 22(209.825,190.15) 22(244.325,190.15)

## Nets (pads, with @x,y where several pads share a name; then routed paths per layer and width w, separated by ;. In a path a pad name is that pad's centre, name@x,y a point inside that pad or via, vN(x,y) a via of type N, cw(c..) or ccw(c..) an arc to the next point about the centre after c; other vN are vias at no path point)
pads on no net: Fid2.0 Fid3.0 Fid4.0 Fid5.0

## Polygon pours and split planes (outlines as drawn)
no net on L2 (GND) (split plane): 283.373,0.102 0.102,0.102 0.102,210.398 283.373,210.398
no net on L5 (PWR) (split plane): 283.373,0.102 0.102,0.102 0.102,210.398 283.373,210.398

## Silkscreen, mask and mechanical layers (free items; w line width, h text height)
Top Overlay:
  drawing of 96 lines, arcs and shapes, not listed
  text "Bad / board" at 0.9,196.875 h1
  text "Bad / board" at 35.4,196.875 h1
  text "Bad / board" at 69.9,196.875 h1
  text "Bad / board" at 104.4,196.875 h1
  text "Bad / board" at 138.9,196.875 h1
  text "Bad / board" at 173.4,196.875 h1
  text "Bad / board" at 207.9,196.875 h1
  text "Bad / board" at 242.4,196.875 h1
  text "Bad / board" at 0.9,163.875 h1
  text "Bad / board" at 35.4,163.875 h1
  text "Bad / board" at 69.9,163.875 h1
  text "Bad / board" at 104.4,163.875 h1
  text "Bad / board" at 138.9,163.875 h1
  text "Bad / board" at 173.4,163.875 h1
  text "Bad / board" at 207.9,163.875 h1
  text "Bad / board" at 242.4,163.875 h1
  text "Bad / board" at 0.9,130.875 h1
  text "Bad / board" at 35.4,130.875 h1
  text "Bad / board" at 69.9,130.875 h1
  text "Bad / board" at 104.4,130.875 h1
  text "Bad / board" at 138.9,130.875 h1
  text "Bad / board" at 173.4,130.875 h1
  text "Bad / board" at 207.9,130.875 h1
  text "Bad / board" at 242.4,130.875 h1
  text "Bad / board" at 0.9,97.875 h1
  text "Bad / board" at 35.4,97.875 h1
  text "Bad / board" at 69.9,97.875 h1
  text "Bad / board" at 104.4,97.875 h1
  text "Bad / board" at 138.9,97.875 h1
  text "Bad / board" at 173.4,97.875 h1
  text "Bad / board" at 207.9,97.875 h1
  text "Bad / board" at 242.4,97.875 h1
  text "Bad / board" at 0.9,64.875 h1
  text "Bad / board" at 35.4,64.875 h1
  text "Bad / board" at 69.9,64.875 h1
  text "Bad / board" at 104.4,64.875 h1
  text "Bad / board" at 138.9,64.875 h1
  text "Bad / board" at 173.4,64.875 h1
  text "Bad / board" at 207.9,64.875 h1
  text "Bad / board" at 242.4,64.875 h1
  text "Bad / board" at 0.9,31.875 h1
  text "Bad / board" at 35.4,31.875 h1
  text "Bad / board" at 69.9,31.875 h1
  text "Bad / board" at 104.4,31.875 h1
  text "Bad / board" at 138.9,31.875 h1
  text "Bad / board" at 173.4,31.875 h1
  text "Bad / board" at 207.9,31.875 h1
  text "Bad / board" at 242.4,31.875 h1
V-Groove:
  drawing of 172 lines, arcs and shapes, not listed
  text "V-Groove" at 7.725,229.2 h1 r270
  text "V-Groove" at 34.725,229.2 h1 r270
  text "V-Groove" at 42.225,229.2 h1 r270
  text "V-Groove" at 69.225,229.2 h1 r270
  text "V-Groove" at 76.725,229.2 h1 r270
  text "V-Groove" at 103.725,229.2 h1 r270
  text "V-Groove" at 111.225,229.2 h1 r270
  text "V-Groove" at 138.225,229.2 h1 r270
  text "V-Groove" at 145.725,229.2 h1 r270
  text "V-Groove" at 172.725,229.2 h1 r270
  text "V-Groove" at 180.225,229.2 h1 r270
  text "V-Groove" at 207.225,229.2 h1 r270
  text "V-Groove" at 214.725,229.2 h1 r270
  text "V-Groove" at 241.725,229.2 h1 r270
  text "V-Groove" at 249.225,229.2 h1 r270
  text "V-Groove" at 276.225,229.2 h1 r270
  text "V-Groove" at -18.7,200.725 h1
  text "V-Groove" at -18.7,167.725 h1
  text "V-Groove" at -18.7,134.725 h1
  text "V-Groove" at -18.7,101.725 h1
  text "V-Groove" at -18.7,68.725 h1
  text "V-Groove" at -18.7,35.725 h1
Cutout / Routing:
  lines w2.4: 6.3,17.525 6.3,23.275 ; 6.3,50.525 6.3,56.275 ; 6.3,83.525 6.3,89.275 ; 6.3,116.525 6.3,122.275 ; 6.3,149.525 6.3,155.275 ; 6.3,182.525 6.3,188.275 ; 7.5,8.8 34.5,8.8 ; 7.5,41.8 34.5,41.8 ; 7.5,74.8 34.5,74.8 ; 7.5,107.8 34.5,107.8 ; 7.5,140.8 34.5,140.8 ; 7.5,173.8 34.5,173.8 ; 35.7,11.925 35.7,22.225 ; 35.7,44.925 35.7,55.225 ; 35.7,77.925 35.7,88.225 ; 35.7,110.925 35.7,121.225 ; 35.7,143.925 35.7,154.225 ; 35.7,176.925 35.7,187.225 ; 40.8,17.525 40.8,23.275 ; 40.8,50.525 40.8,56.275 ; 40.8,83.525 40.8,89.275 ; 40.8,116.525 40.8,122.275 ; 40.8,149.525 40.8,155.275 ; 40.8,182.525 40.8,188.275 ; 42,8.8 69,8.8 ; 42,41.8 69,41.8 ; 42,74.8 69,74.8 ; 42,107.8 69,107.8 ; 42,140.8 69,140.8 ; 42,173.8 69,173.8 ; 70.2,11.925 70.2,22.225 ; 70.2,44.925 70.2,55.225 ; 70.2,77.925 70.2,88.225 ; 70.2,110.925 70.2,121.225 ; 70.2,143.925 70.2,154.225 ; 70.2,176.925 70.2,187.225 ; 75.3,17.525 75.3,23.275 ; 75.3,50.525 75.3,56.275 ; 75.3,83.525 75.3,89.275 ; 75.3,116.525 75.3,122.275 ; 75.3,149.525 75.3,155.275 ; 75.3,182.525 75.3,188.275 ; 76.5,8.8 103.5,8.8 ; 76.5,41.8 103.5,41.8 ; 76.5,74.8 103.5,74.8 ; 76.5,107.8 103.5,107.8 ; 76.5,140.8 103.5,140.8 ; 76.5,173.8 103.5,173.8 ; 104.7,11.925 104.7,22.225 ; 104.7,44.925 104.7,55.225 ; 104.7,77.925 104.7,88.225 ; 104.7,110.925 104.7,121.225 ; 104.7,143.925 104.7,154.225 ; 104.7,176.925 104.7,187.225 ; 109.8,17.525 109.8,23.275 ; 109.8,50.525 109.8,56.275 ; 109.8,83.525 109.8,89.275 ; 109.8,116.525 109.8,122.275 ; 109.8,149.525 109.8,155.275 ; 109.8,182.525 109.8,188.275 ; 111,8.8 138,8.8 ; 111,41.8 138,41.8 ; 111,74.8 138,74.8 ; 111,107.8 138,107.8 ; 111,140.8 138,140.8 ; 111,173.8 138,173.8 ; 139.2,11.925 139.2,22.225 ; 139.2,44.925 139.2,55.225 ; 139.2,77.925 139.2,88.225 ; 139.2,110.925 139.2,121.225 ; 139.2,143.925 139.2,154.225 ; 139.2,176.925 139.2,187.225 ; 144.3,17.525 144.3,23.275 ; 144.3,50.525 144.3,56.275 ; 144.3,83.525 144.3,89.275 ; 144.3,116.525 144.3,122.275 ; 144.3,149.525 144.3,155.275 ; 144.3,182.525 144.3,188.275 ; 145.5,8.8 172.5,8.8 ; 145.5,41.8 172.5,41.8 ; 145.5,74.8 172.5,74.8 ; 145.5,107.8 172.5,107.8 ; 145.5,140.8 172.5,140.8 ; 145.5,173.8 172.5,173.8 ; 173.7,11.925 173.7,22.225 ; 173.7,44.925 173.7,55.225 ; 173.7,77.925 173.7,88.225 ; 173.7,110.925 173.7,121.225 ; 173.7,143.925 173.7,154.225 ; 173.7,176.925 173.7,187.225 ; 178.8,17.525 178.8,23.275 ; 178.8,50.525 178.8,56.275 ; 178.8,83.525 178.8,89.275 ; 178.8,116.525 178.8,122.275 ; 178.8,149.525 178.8,155.275 ; 178.8,182.525 178.8,188.275 ; 180,8.8 207,8.8 ; 180,41.8 207,41.8 ; 180,74.8 207,74.8 ; 180,107.8 207,107.8 ; 180,140.8 207,140.8 ; 180,173.8 207,173.8 ; 208.2,11.925 208.2,22.225 ; 208.2,44.925 208.2,55.225 ; 208.2,77.925 208.2,88.225 ; 208.2,110.925 208.2,121.225 ; 208.2,143.925 208.2,154.225 ; 208.2,176.925 208.2,187.225 ; 213.3,17.525 213.3,23.275 ; 213.3,50.525 213.3,56.275 ; 213.3,83.525 213.3,89.275 ; 213.3,116.525 213.3,122.275 ; 213.3,149.525 213.3,155.275 ; 213.3,182.525 213.3,188.275 ; 214.5,8.8 241.5,8.8 ; 214.5,41.8 241.5,41.8 ; 214.5,74.8 241.5,74.8 ; 214.5,107.8 241.5,107.8 ; 214.5,140.8 241.5,140.8 ; 214.5,173.8 241.5,173.8 ; 242.7,11.925 242.7,22.225 ; 242.7,44.925 242.7,55.225 ; 242.7,77.925 242.7,88.225 ; 242.7,110.925 242.7,121.225 ; 242.7,143.925 242.7,154.225 ; 242.7,176.925 242.7,187.225 ; 247.8,17.525 247.8,23.275 ; 247.8,50.525 247.8,56.275 ; 247.8,83.525 247.8,89.275 ; 247.8,116.525 247.8,122.275 ; 247.8,149.525 247.8,155.275 ; 247.8,182.525 247.8,188.275 ; 249,8.8 276,8.8 ; 249,41.8 276,41.8 ; 249,74.8 276,74.8 ; 249,107.8 276,107.8 ; 249,140.8 276,140.8 ; 249,173.8 276,173.8 ; 277.2,11.925 277.2,22.225 ; 277.2,44.925 277.2,55.225 ; 277.2,77.925 277.2,88.225 ; 277.2,110.925 277.2,121.225 ; 277.2,143.925 277.2,154.225 ; 277.2,176.925 277.2,187.225
Panel outline:
  lines w0.1: 0,0 0,210.5 283.5,210.5 283.5,0 0,0
Card outline:
  drawing of 192 lines, arcs and shapes, not listed

## Dimensions
249,211 to 276,211 on Outline
214.5,211 to 241.5,211 on Outline
180,211 to 207,211 on Outline
145.5,211 to 172.5,211 on Outline
111,211 to 138,211 on Outline
76.5,211 to 103.5,211 on Outline
42,211 to 69,211 on Outline
7.5,211 to 34.5,211 on Outline
-3.9,175 to -3.9,200.5 on Outline
-3.9,142 to -3.9,167.5 on Outline
-3.9,109 to -3.9,134.5 on Outline
-3.9,76 to -3.9,101.5 on Outline
-3.9,43 to -3.9,68.5 on Outline
-4,10 to -4,35.5 on Outline
0,210.5 to 283.5,210.5 on Outline
283.5,0 to 283.5,210.5 on Outline

## Panel: embedded boards
"EE02-Module.PcbDoc" at 7.5,10, 6 rows x 8 columns, spacing 33 x 34.5, rotation 0